# Altium PCB BlocoMotorReto.PcbDoc
Units mm, origin at the board's own origin, x right, y up, seen from the top; angles counter-clockwise.
Board outline 51.5 x 28 mm, 2 copper layers (Top Layer, Bottom Layer); 20 components, 35 nets, 99 pads, 19 vias.
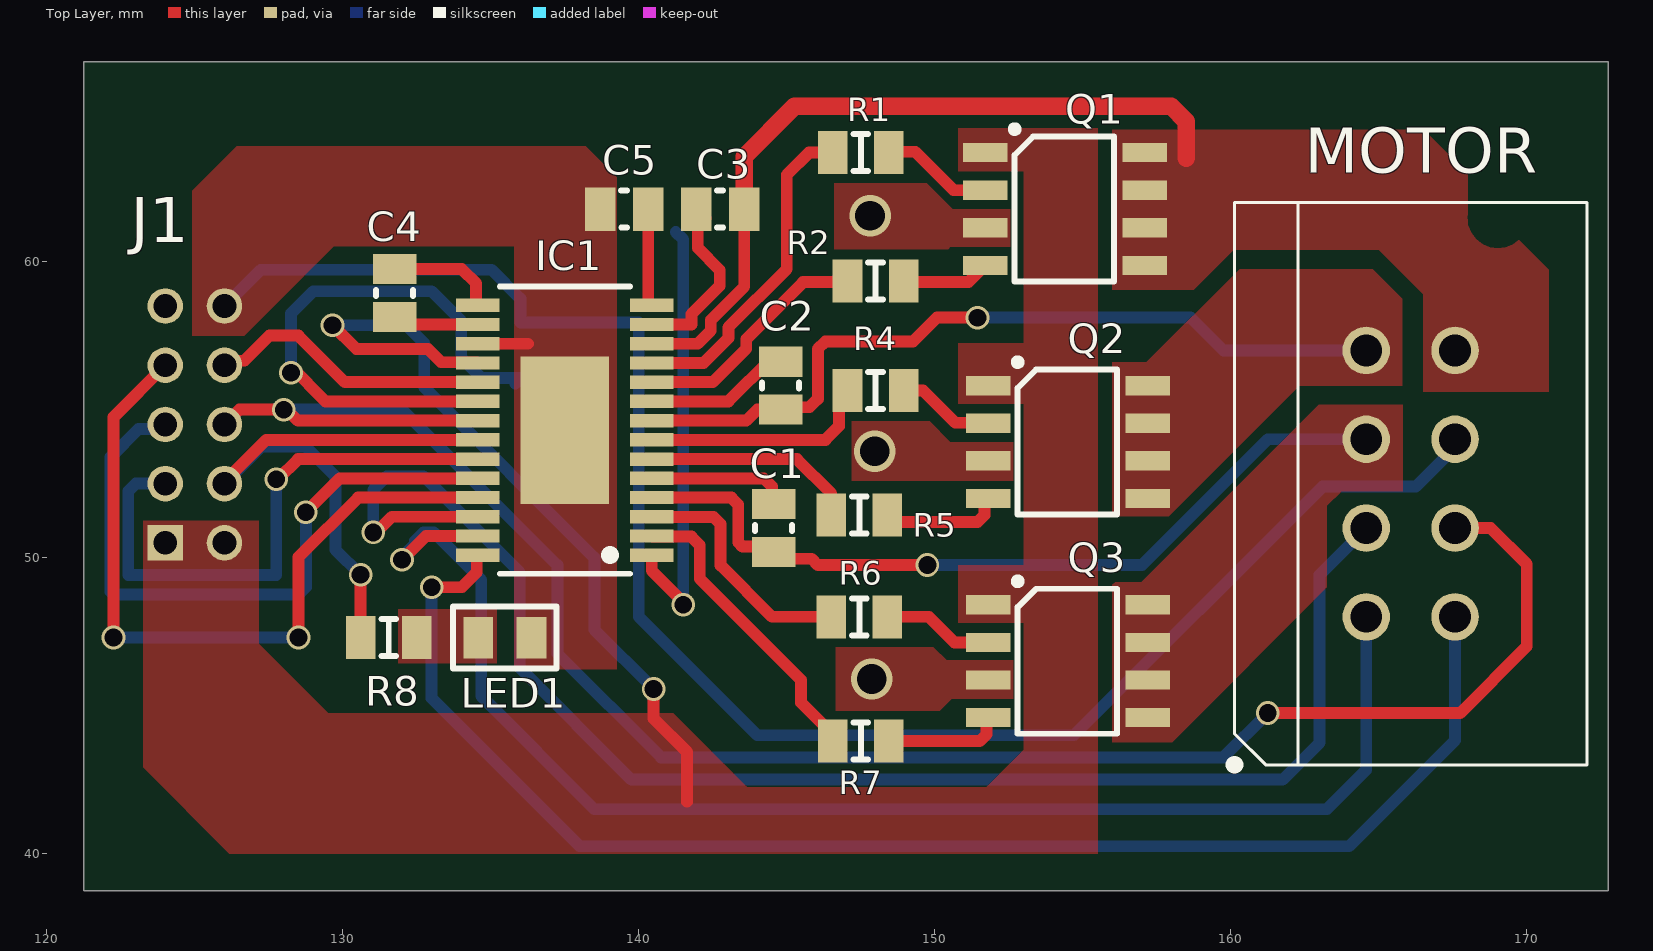
[diagram p0: Top Layer view]
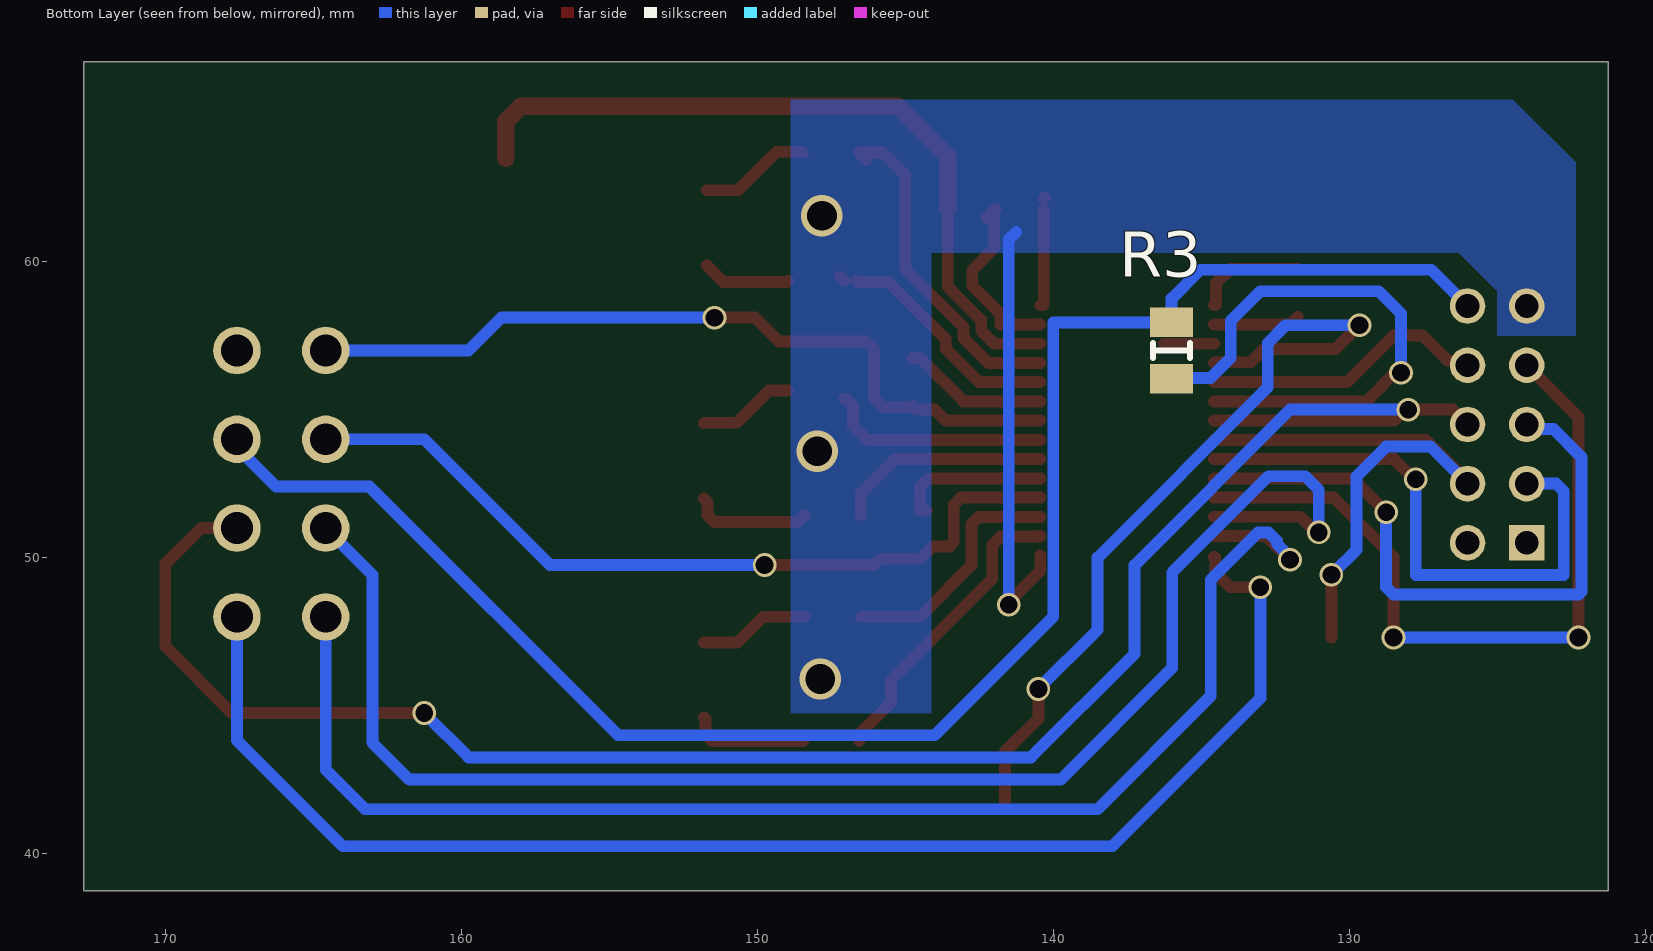
[diagram p1: Bottom Layer view, seen from below]
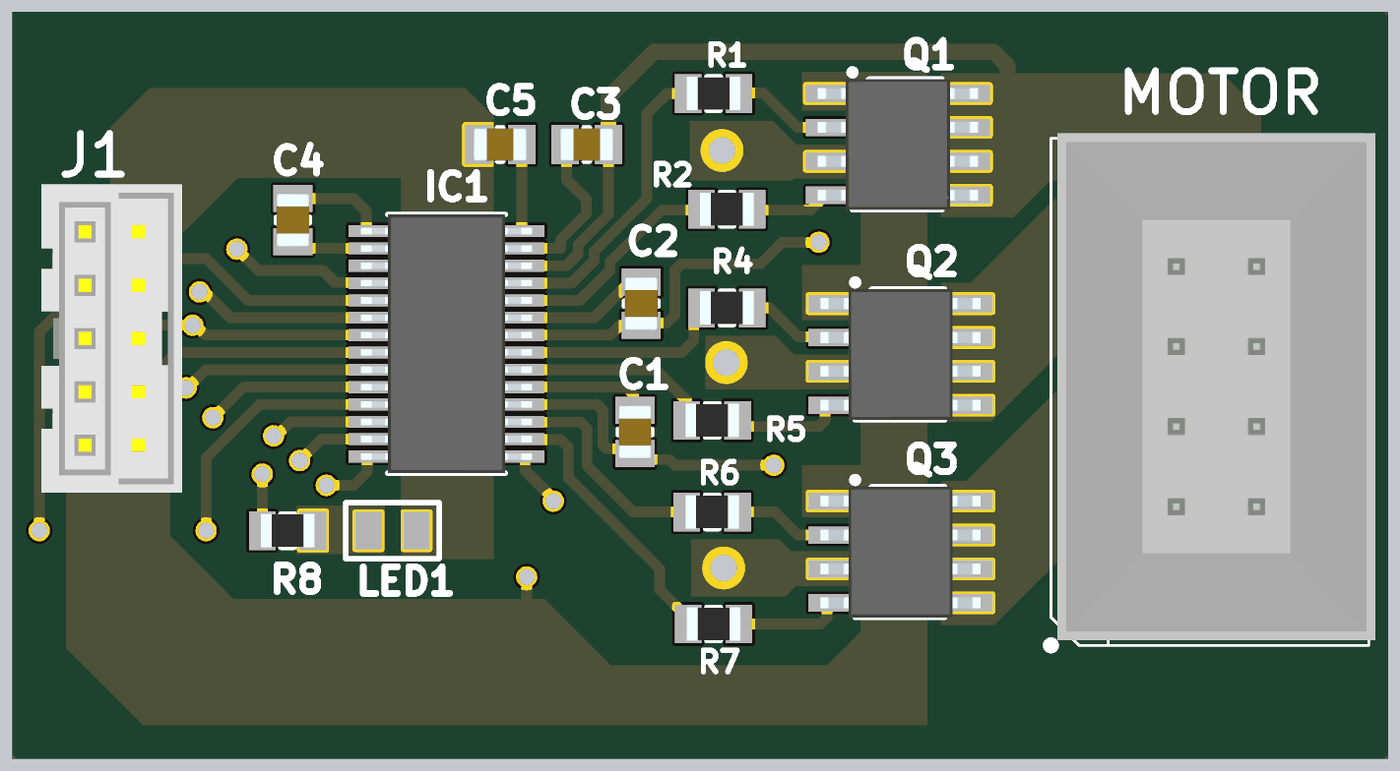
[diagram p2: 3D render of the assembled board from above, using the file's embedded part models]

## Layer stack, top to bottom
Top Solder: solder mask 0.0102, Solder Resist, Dk 3.5
Top Layer: signal copper 0.0356
Dielectric 1: dielectric 0.32, FR-4, Dk 4.8
Bottom Layer: signal copper 0.0356
Bottom Solder: solder mask 0.0102, Solder Resist, Dk 3.5

## Board outline
121.25,38.75 172.75,38.75 172.75,66.75 121.25,66.75

## Design rules (kind name [scope] priority, off if disabled: settings)
Clearance [All] p1: gap=0.2 ignorepadtopadclearanceinfootprint=FALSE
DiffPairsRouting [All] p1: maxlimit=10 minlimit=0.254 mostfreqgap=0.254 toplayer_minwidth=0.381 toplayer_maxwidth=10 toplayer_prefwidth=0.381 bottomlayer_minwidth=0.381 bottomlayer_maxwidth=10 bottomlayer_prefwidth=0.381 maxuncoupledlength=12.7
PlaneConnect [All] p1: planeconnectstyle=Direct reliefexpansion=0.508 reliefentries=4 reliefconductorwidth=0.254 reliefairgap=0.254
PolygonConnect [All] p1: connectstyle=Direct reliefconductorwidth=0.254 reliefentries=4 polygonreliefangle="90 Angle" airgapwidth=0.254
RoutingVias [All] p1: holewidth=0.711 width=1.27 viastyle="Through Hole" minholewidth=0.711 minwidth=1.27 maxholewidth=10 maxwidth=10
SolderMaskExpansion [All] p1: expansion=0.102
Width [All] p1: maxlimit=10 minlimit=0.254 preferedwidth=0.254
28 further rules are at their usual default settings.

## Components (designator, comment, footprint, x,y, rotation, side; value= is the part's Value field where it differs from the comment)
C1 "0.033uF" "CAP0805 50v" 144.556,51 r90 top
C2 "0.033uF" "CAP0805 50v" 144.788,55.81 r90 top
C3 "0.033uF" "CAP0805 50v" 142.75,61.775 r180 top
C4 "0.47uF" "CAP0805 50v" 131.75,58.94 r270 top
C5 "0.68uF" "CAP0805 50v" 139.506,61.775 r0 top
IC1 "A4915 Motor Driver" "A4915 Motor Driver" 137.5,54.304 r180 top
J1 "LS2-105-01-F-D" "CONN SINAL 10POS" 124,50.5 r90 top
LED1 "LED SMD 0805" "LED SMD" 135.475,47.3 r180 top
MOTOR "0444320801" "CONN MAIN MOTOR" 165.779,52.5 r270 top locked (schematic designator MOTOR1)
Q1 "IRF8313TRPBF" "MOSFET MOTOR 2N-CH 30V 9.7A 8-SOIC" 154.4,61.78 r0 top
Q2 "IRF8313TRPBF" "MOSFET MOTOR 2N-CH 30V 9.7A 8-SOIC" 154.5,53.905 r0 top
Q3 "IRF8313TRPBF" "MOSFET MOTOR 2N-CH 30V 9.7A 8-SOIC" 154.5,46.5 r0 top
R1 "330R" "RES 0805" 147.5,63.685 r0 top
R2 "330R" "RES 0805" 148,59.35 r0 top
R3 "40.2K" "RES 0805" 136,57 r90 bottom
R4 "330R" "RES 0805" 148,55.65 r0 top
R5 "330R" "RES 0805" 147.45,51.434 r0 top
R6 "330R" "RES 0805" 147.45,48 r0 top
R7 "330R" "RES 0805" 147.5,43.8 r0 top
R8 "330R" "RES 0805" 131.55,47.3 r0 top

## Footprints (in the part's own frame and the unit in brackets; to place one, negate y for a bottom-side part, rotate by r counter-clockwise, add the part's x,y. Pads: shape width x height; smd on the part's side, far side on the other; paste and mask are expansions set on the pad)
"A4915 Motor Driver" [mm] "28-Pin TSSOP  with Exposed Thermal Pad"
  rect 1.475x0.45 smd: 1(-2.938,4.225) 2(-2.938,3.575) 3(-2.938,2.925) 4(-2.938,2.275) 5(-2.938,1.625) 6(-2.938,0.975) 7(-2.938,0.325) 8(-2.938,-0.325) 9(-2.938,-0.975) 10(-2.938,-1.625) 11(-2.938,-2.275) 12(-2.938,-2.925) 13(-2.938,-3.575) 14(-2.938,-4.225) 15(2.938,-4.225) 16(2.938,-3.575) 17(2.938,-2.925) 18(2.938,-2.275) 19(2.938,-1.625) 20(2.938,-0.975) 21(2.938,-0.325) 22(2.938,0.325) 23(2.938,0.975) 24(2.938,1.625) 25(2.938,2.275) 26(2.938,2.925) 27(2.938,3.575) 28(2.938,4.225)
  rect 3x5 smd: 29(0,0)
  silkscreen extent -2.2,-4.85 2.2,4.85, body extent -3.2,-4.85 3.2,4.85, height 1.2
"CAP0805 50v" [mm] "CAPC2012X94N"
  rect 1.02x1.47 smd: 1(-0.81,0) 2(0.81,0)
  silkscreen extent -0.1,-0.63 0.1,0.63, body extent -1,-0.63 1,0.63, height 0.94
"CONN MAIN MOTOR" [mm] "CONN HEADER VERT 8POS 3MM"
  round 1.605 hole 1.07: 1(4.5,-1.2) 2(1.5,-1.2) 3(-1.5,-1.2) 4(-4.5,-1.2) 5(4.5,1.8) 6(1.5,1.8) 7(-1.5,1.8) 8(-4.5,1.8)
  silkscreen extent -9.5,-5.65 9.5,6.25, body extent -9.7,-5.4 9.3,6.5, height 11.65
"CONN SINAL 10POS" [mm] "CONN Sinal MOTOR CONN SELF-MATE 10POS VERT GOLD"
  rect 1.2x1.2 hole 0.8: 1(0,0)
  round 1.2 hole 0.8: 2(0,-2) 3(2,0) 4(2,-2) 5(4,0) 6(4,-2) 7(6,0) 8(6,-2) 9(8,0) 10(8,-2)
  body extent -1.78,-3.6 9.78,1.67, height 6.35
"LED SMD" [mm] "LED Indication - Discrete 2V 0805 (2012 Metric)"
  rect 1x1.4 smd: 1(-0.9,0) 2(0.9,0)
  silkscreen extent -1.75,-1.05 1.75,1.05
"MOSFET MOTOR 2N-CH 30V 9.7A 8-SOIC" [mm]
  rect 1.5x0.65 smd: 1(-2.7,1.905) 2(-2.7,0.635) 3(-2.7,-0.635) 4(-2.7,-1.905) 5(2.7,-1.905) 6(2.7,-0.635) 7(2.7,0.635) 8(2.7,1.905)
  silkscreen extent -1.8,-2.45 1.65,2.8, body extent -3,-2.45 3,2.45, height 1.75
"RES 0805" [mm] "RESC2012X65N"
  rect 1x1.45 smd: 1(-0.95,0) 2(0.95,0)
  silkscreen extent -0.25,-0.63 0.25,0.63, body extent -1,-0.63 1,0.63, height 0.65

## Part data
C1 C2 C3 C4 C5: library part "CAP 0805 50V", "Capacitor / 08055A101JAT2A", Manufacturer_Name=AVX, Manufacturer_Part_Number=08055A101JAT2A, Mouser Part Number=581-08055A101J, RS Part Number=1243222, Allied_Number=70474488, Allied Price/Stock=https://www.alliedelec.com/avx-08055a101jat2a/70474488/, Datasheet Link=https://componentsearchengine.com/Datasheets/1/06031A100FAT2A.pdf, Height=0.94mm, Mouser Price/Stock=https://www.mouser.com/Search/Refine.aspx?Keyword=581-08055A101J, RS Price/Stock=https://uk.rs-online.com/web/p/products/1243222
IC1: "Integrated Circuit /  /  28-Pin TSSOP / with Exposed Thermal Pad /  / https://pdf1.alldatasheet.com/datasheet-pdf/view/848035/ALLEGRO/A4915.html", Manufacturer_Name="Allegro Microsystems", Manufacturer_Part_Number=A4915MLPTR-T, Datasheet Link=http://www.allegromicro.com/~/media/Files/Datasheets/A4915-Datasheet.ashx, Height=1.2mm
J1: library part "CONN SInal Motor", "CONN SELF-MATE 10POS VERT GOLD /  / SAM11451-ND /  / LS2-105-01-F-D", Manufacturer_Name=FCI, Manufacturer_Part_Number=10132797-015100LF, Mouser Part Number=649-10132797015100LF, Datasheet Link=https://www.amphenol-icc.com/media/wysiwyg/files/drawing/10132797.pdf, Height=2mm, Mouser Price/Stock=https://www.mouser.com/Search/Refine.aspx?Keyword=649-10132797015100LF
LED1: "LED /  / LED Indication - Discrete 2V 0805 (2012 Metric) /  / LTST-C170KRKT /  / 160-1415-1-ND", Manufacturer_Name=Lite-On, Manufacturer_Part_Number=LTST-C170KRKT, Mouser Part Number=859-LTST-C170KRKT, RS Part Number=6920916P, Datasheet Link=https://componentsearchengine.com/Datasheets/1/LTST-C170KRKT.pdf, Height=1.2mm, Mouser Price/Stock=https://www.mouser.com/Search/Refine.aspx?Keyword=859-LTST-C170KRKT, RS Price/Stock=http://uk.rs-online.com/web/p/products/6920916P
MOTOR: library part "CONN Main Motor", "CONN HEADER VERT 8POS 3MM /  / 0444320801 /  / Connector Header Through Hole 8 position 0.118\" (3.00mm)", Manufacturer_Name=Molex, Manufacturer_Part_Number=0444320802, Datasheet Link=http://static6.arrow.com/aropdfconversion/70af9c395913d6e0132bcfc0bf15a6e7757c94/0444320802_pcb_headers.pdf, Height=11mm
Q1 Q2 Q3: library part "MOSFET MOTOR 2N-CH 30V 9.7A 8-SOIC", "Mosfet Array 2 N-Channel (Dual) 30V 9.7A 2W Surface Mount 8-SO /  / IRF8313TRPBFTR-ND", Manufacturer_Name=Infineon, Mouser Part Number=942-IRF8313TRPBF, RS Part Number=8273903, Allied_Number=70018020, Allied Price/Stock=https://www.alliedelec.com/infineon-irf8313trpbf/70018020/, Datasheet Link=https://www.infineon.com/dgdl/irf8313pbf.pdf?fileId=5546d462533600a40153560d38521d63, Height=1.75mm, Manufacturer_Part_Number=IRF8313TRPBF, Mouser Price/Stock=https://www.mouser.com/Search/Refine.aspx?Keyword=942-IRF8313TRPBF, RS Price/Stock=https://uk.rs-online.com/web/p/products/8273903
R1 R2 R3 R4 R5 R6 R7 R8: library part "Resistor 0805", "Resistor", Manufacturer_Name="TE Connectivity", Manufacturer_Part_Number=CPF0805B105RE1, Mouser Part Number=279-CPF0805B105RE1, RS Part Number=1239398, Datasheet Link=http://docs-europe.electrocomponents.com/webdocs/13d1/0900766b813d116f.pdf, Height=0.65mm, Mouser Price/Stock=https://www.mouser.com/Search/Refine.aspx?Keyword=279-CPF0805B105RE1, RS Price/Stock=http://uk.rs-online.com/web/p/products/1239398

## Via types
v1: diameter 0.8, hole 0.6, Top Layer to Bottom Layer, 16 vias
v2: diameter 1.4, hole 1, Top Layer to Bottom Layer, 3 vias

## Nets (pads, with @x,y where several pads share a name; then routed paths per layer and width w, separated by ;. In a path a pad name is that pad's centre, name@x,y a point inside that pad or via, vN(x,y) a via of type N, cw(c..) or ccw(c..) an arc to the next point about the centre after c; other vN are vias at no path point)
BRAKE: IC1.25 J1.7 | length 25.8
  Top Layer w0.4: v1(122.25,47.3) 122.25,54.75 J1.7 ; v1(128.5,47.3) 128.5,50.017 130.512,52.029 IC1.25
  Bottom Layer w0.4: v1(122.25,47.3) v1(128.5,47.3)
DIR: IC1.24 J1.5 | length 22.4
  Top Layer w0.4: v1(128.75,51.535) 129.894,52.679 IC1.24
  Bottom Layer w0.4: J1.5 123.847,54.347 123.097,54.347 122.15,53.4 122.15,48.85 122.25,48.75 128.5,48.75 128.75,49 v1(128.75,51.535)
ENABLE: IC1.23 J1.3 | length 19.5
  Top Layer w0.4: v1(127.75,52.65) 127.806,52.65 128.485,53.329 IC1.23
  Bottom Layer w0.4: J1.3 123,52.5 122.75,52.25 122.75,49.419 127.75,49.419 v1(127.75,52.65)
FASE_A: C3.1 IC1.12 MOTOR.8 Q1.5 Q1.6 Q1.7 Q1.8 | length 25.6
  Top Layer w0.4: IC1.12 141.991,57.229 142.429,57.668 142.429,58.028 143.56,59.159 C3.1
  Top Layer w0.6: C3.1 143.56,63.55 145.26,65.25 157.987,65.25 158.5,64.737 158.5,63.5
FASE_B: C2.1 IC1.8 MOTOR.4 Q2.5 Q2.6 Q2.7 Q2.8 | length 27.1
  Top Layer w0.4: IC1.8 143.629,54.629 144,55 144.631,55 144.75,55.119 144.788,55.081 145.766,55.081 146.05,55.366 146.05,57.05 146.3,57.3 149.261,57.3 150.07,58.109 v1(151.441,58.109)
  Bottom Layer w0.4: v1(151.441,58.109) 158.641,58.109 159.75,57 MOTOR.4
FASE_C: C1.1 IC1.4 MOTOR.3 Q3.5 Q3.6 Q3.7 Q3.8 | length 27.8
  Top Layer w0.4: IC1.4 143.126,52.029 143.36,51.795 143.36,50.513 143.5,50.372 144.093,50.372 144.5,49.965 145.835,49.965 146.05,49.75 v1(149.75,49.75) 149.75,49.847 v1@149.673,49.923
  Bottom Layer w0.4: v1(149.75,49.75) 157,49.75 161.25,54 MOTOR.3
FAULT: IC1.22 J1.4 R8.1 | length 19.8
  Top Layer w0.4: J1.4@126.147,52.5 J1.4 126,52.57 127.409,53.979 IC1.22 ; R8.1 v1(130.6,49.419)
  Bottom Layer w0.4: J1.4 127.25,53.75 128.75,53.75 129.75,52.75 129.75,50.269 v1(130.6,49.419)
GHA: IC1.11 R1.1 | length 11.5
  Top Layer w0.4: IC1.11 142.189,56.579 143.029,57.419 143.029,57.779 145,59.75 145,62.935 145.75,63.685 R1.1 R1.1@146.304,63.439
GHB: IC1.7 R4.1 | length 7.6
  Top Layer w0.4: IC1.7 146.302,53.979 146.761,54.439 146.761,55.125 146.991,55.354 R4.1@147.05,55.354
GHC: IC1.3 R6.1 | length 8.3
  Top Layer w0.4: IC1.3 140.448,51.37 142.526,51.37 142.76,51.135 142.76,49.735 144.495,48 R6.1
GLA: IC1.10 R2.1 | length 8
  Top Layer w0.4: IC1.10 142.499,55.929 143.629,57.059 143.629,57.387 145.552,59.309 146.609,59.309 R2.1@146.65,59.35 ; R2.1 R2.1@147.2,59.5
GLB: IC1.6 R5.1 | length 7.3
  Top Layer w0.4: IC1.6 145.339,53.329 146.5,52.169 R5.1
GLC: IC1.2 R7.1 | length 10.2
  Top Layer w0.4: IC1.2 140.458,50.71 141.776,50.71 142.06,50.425 142.06,49.285 145.48,45.865 145.48,45.095 146.55,44.025 R7.1
GND: C5.1 IC1.17 IC1.29 J1.10 LED1.1 MOTOR.7 R3.2 | length 60.9
  Top Layer w0.4: IC1.17 136.25,57.229
  Bottom Layer w0.4: J1.10 127.225,59.725 135.025,59.725 136,58.75 R3.2 140,57.95 140,48 144,44 154.7,44 163.1,52.4 166.25,52.4 167.579,53.729 MOTOR.7
HA: IC1.26 MOTOR.2 | length 51.9
  Top Layer w0.4: v1(131.025,50.853) 131.133,50.853 131.659,51.379 IC1.26
  Bottom Layer w0.4: v1(131.025,50.853) 131.025,52.291 131.484,52.75 132.725,52.75 135.975,49.5 135.975,46.275 139.75,42.5 161.75,42.5 163,43.75 163,49.421 MOTOR.2
HB: IC1.27 MOTOR.1 | length 48.1
  Top Layer w0.4: v1(132,49.925) 132.804,50.729 IC1.27
  Bottom Layer w0.4: v1(132,49.925) 132,50.033 132.442,50.475 132.442,50.57 132.725,50.853 133.072,50.853 134.675,49.25 134.675,45.325 138.5,41.5 163.25,41.5 164.579,42.829 MOTOR.1 ; MOTOR.1@165.1,48 MOTOR.1@165.1,48.2
HC: IC1.28 MOTOR.5 | length 48.3
  Top Layer w0.4: v1(133,49) 134.025,49 134.525,49.5 134.525,50 134.55,50.025 IC1.28@134.562,50.025
  Bottom Layer w0.4: v1(133,49) 133,45.25 138,40.25 164,40.25 167.579,43.829 MOTOR.5
NetC1_2: C1.2 IC1.5 | length 5
  Top Layer w0.4: IC1.5 144.221,52.679 144.5,52.4 144.5,51.866 C1.2 ; C1.2@144.275,51.585 C1.2@144.5,51.585
NetC2_2: C2.2 IC1.9 | length 4.9
  Top Layer w0.4: IC1.9 143.029,55.279 144.489,56.739 C2.2@144.75,56.739
NetC3_2: C3.2 IC1.13 | length 6.4
  Top Layer w0.4: IC1.13@140.463,57.904 IC1.13 141.776,57.879 141.776,58.223 142.736,59.183 142.736,59.717 141.991,60.463 141.991,61.724 C3.2 ; C3.2@142.009,61.775 C3.2@142.25,61.465
NetC4_1: C4.1 IC1.15 | length 3.7
  Top Layer w0.4: C4.1 134.016,59.75 134.5,59.266 134.5,58.554 134.525,58.529 IC1.15
NetC4_2: C4.2 IC1.16 | length 2.9
  Top Layer w0.4: C4.2 132.001,57.879 IC1.16
NetC5_2: C5.2 IC1.14 | length 3.4
  Top Layer w0.4: C5.2@140.291,62.175 C5.2@140.319,62.147 ; C5.2 140.316,58.554 140.341,58.529 IC1.14
NetIC1_20: IC1.20 R3.1 | length 19.1
  Top Layer w0.4: v1@128.25,56.441 129.412,55.279 IC1.20
  Bottom Layer w0.4: v1(128.25,56.25) 128.25,58.25 129,59 133,59 134,58 134,56.75 134.675,56.075 135.975,56.075 R3.1 R3.1@135.825,55.875
NetLED1_2: LED1.2 R8.2
NetQ1_2: Q1.2 R1.2 | length 3.8
  Top Layer w0.4: R1.2 148.478,63.713 149.337,63.713 150.635,62.415 Q1.2
NetQ1_4: Q1.4 R2.2 | length 3
  Top Layer w0.4: R2.2 148.991,59.309 151.134,59.309 Q1.4
NetQ2_2: Q2.2 R4.2 | length 3.3
  Top Layer w0.4: R4.2 149.6,55.65 150.691,54.559 151.781,54.559 Q2.2
NetQ2_4: Q2.4 R5.2 | length 4.1
  Top Layer w0.4: R5.2 148.634,51.2 151.441,51.2 151.675,51.434 151.675,51.875 Q2.4
NetQ3_2: Q3.2 R6.2 | length 3.8
  Top Layer w0.4: R6.2 149.8,48 150.665,47.135 Q3.2
NetQ3_4: Q3.4 R7.2 | length 4
  Top Layer w0.4: R7.2 151.516,43.8 151.75,44.034 151.75,44.545 Q3.4
P_GND: IC1.1 J1.9 Q1.3 Q2.3 Q3.3 | length 14.8
  Top Layer w0.4: IC1.1 140.438,49.562 141.5,48.5 v1(141.5,48.405)
  Bottom Layer w0.4: 141.25,61 141.5,60.75 v1(141.5,48.405)
  other v2: 147.875,45.9 147.975,53.6 147.812,61.55
P_VCC: IC1.18 J1.1 J1.2 Q1.1 Q2.1 Q3.1 | length 28
  Top Layer w0.4: v1(129.65,57.85) 130.45,57.05 132.875,57.05 133.321,56.604 134.537,56.604 IC1.18 ; v1(140.5,45.562) 140.5,44.562 141.63,43.433 141.63,41.75
  Bottom Layer w0.4: v1(129.65,57.85) 132.15,57.85 132.75,57.25 132.75,55.75 138.5,50 138.5,47.563 v1(140.5,45.562)
SPEED: IC1.19 J1.8 | length 9.8
  Top Layer w0.4: J1.8@126.175,56.5 J1.8 126.153,56.653 126.673,56.653 127.52,57.5 128.5,57.5 130.071,55.929 IC1.19
VDD: IC1.21 J1.6 MOTOR.6 | length 64.8
  Top Layer w0.4: J1.6 126.5,55 v1(128,55) 128.108,55 128.479,54.629 IC1.21 ; v1(161.25,44.75) 167.75,44.75 170,47 170,49.785 168.785,51 MOTOR.6
  Bottom Layer w0.4: v1(128,55) 132,55 137.25,49.75 137.25,46.75 140.75,43.25 159.75,43.25 v1(161.25,44.75)

## Polygon pours and split planes (outlines as drawn)
FASE_A on Top Layer "Top Layer-FASE_A" (solid, pour order 58): 156,59.05 158.75,59.05 160.1,60.4 165,60.4 166.5,58.9 166.5,55.6 170.75,55.6 170.75,59.725 169.75,60.725 168.5,60.725 168,61.225 168,62.975 166.525,64.45 156,64.45
P_VCC on Top Layer "Top Layer-P_VCC 2" (solid, pour order 78): 151.5,42 153.525,44.025 154.309,44.025 154.309,41 151.5,41
GND on Top Layer "Top Layer-GND" (solid, pour order 32): 139.259,46.233 139.259,62.183 135.784,62.183 135.784,46.233
GND on Top Layer "Top Layer-GND 1" (solid, pour order 70): 139.259,62 139.259,62.85 138.209,63.9 126.409,63.9 124.909,62.4 124.909,57.5 126.673,57.5 129.698,60.525 136.884,60.525 137.084,60.725
P_VCC on Top Layer "Top Layer-P_VCC 1" (solid, pour order 76): 155.5,40 126.163,40 123.25,42.912 123.25,51.25 127.162,51.25 127.162,47.088 129.5,44.75 141.162,44.75 143.662,42.25 155.5,42.25
no net on Top Layer "Top Layer-No Net 7" (solid, pour order 74): 155.5,40.75
no net on Top Layer "Top Layer-No Net 8" (solid, pour order 68): 135.75,62
FASE_C on Top Layer "Top Layer-FASE_C" (solid, pour order 56): 156.969,49.169 162.969,55.169 165.806,55.169 165.806,52.25 163.75,52.25 163.25,51.75 163.25,48.995 158.024,43.769 156,43.769 156,49.169
FASE_B on Top Layer "Top Layer-FASE_B" (solid, pour order 54): 165.8,55.81 165.8,58.75 164.8,59.75 160.3,59.75 157.15,56.6 156,56.6 156,51.4 157.9,51.4 162.31,55.81
no net on Top Layer "Top Layer-No Net" (solid, pour order 52): 168.5,55.81
no net on Top Layer "Top Layer-No Net 1" (solid, pour order 50): 168,55.81
no net on Top Layer "Top Layer-No Net 2" (solid, pour order 36): 170,57
NetLED1_2 on Top Layer "Top Layer-NetLED1_2" (solid, pour order 34): 135.2,46.425 135.2,48.25 131.875,48.25 131.875,46.425
no net on Top Layer "Top Layer-No Net 3" (solid, pour order 30): 135.925,51.775
no net on Top Layer "Top Layer-No Net 4" (solid, pour order 24): 149.012,63.55
P_GND on Top Layer "Top Layer-P_GND" (solid, pour order 22): 152.55,60.5 150.525,60.5 150.45,60.425 147.6,60.425 146.609,60.425 146.609,62.65 147.625,62.65 149.725,62.65 150.6,61.775 152.55,61.775
P_GND on Top Layer "Top Layer-P_GND 1" (solid, pour order 20): 152.65,45.225 150.575,45.225 150.175,44.825 147.675,44.825 146.65,44.825 146.65,46.975 147.725,46.975 149.95,46.975 150.4,46.525 152.65,46.525
no net on Top Layer "Top Layer-No Net 5" (solid, pour order 18): 152.5,53.25
P_GND on Top Layer "Top Layer-P_GND 2" (solid, pour order 16): 152.65,53.9 152.65,52.6 150.7,52.6 148.2,52.6 147.2,52.6 147.2,54.6 148.2,54.6 149.825,54.6 150.525,53.9
P_VCC on Top Layer "Top Layer-P_VCC" (solid, pour order 12): 150.8,63.05 150.8,64.5 155.5,64.5 155.5,40.75 153,40.75 153,47.8 150.8,47.8 150.8,49.75 153,49.75 153,55.2 150.8,55.2 150.8,57.25 153,57.25 153,63.05
no net on Top Layer "Top Layer-No Net 6" (solid, pour order 0): 132.5,48.5
P_GND on Bottom Layer "Bottom Layer-P_GND 1" (solid, pour order 64): 124.475,65.475 122.351,63.351 122.351,57.5 125,57.5 125,59 126.3,60.3 145,60.3 145,65.475
P_GND on Bottom Layer "Bottom Layer-P_GND" (solid, pour order 26): 148.875,65.475 148.875,44.75 144.125,44.75 144.125,65.475

## Dimensions
172.75,66.75 to 172.75,38.75 on Top Layer
121.25,38.75 to 172.75,38.75 on Top Layer